# EAGLE board SwitchMount v1.0 (EAGLE 6.6.0)
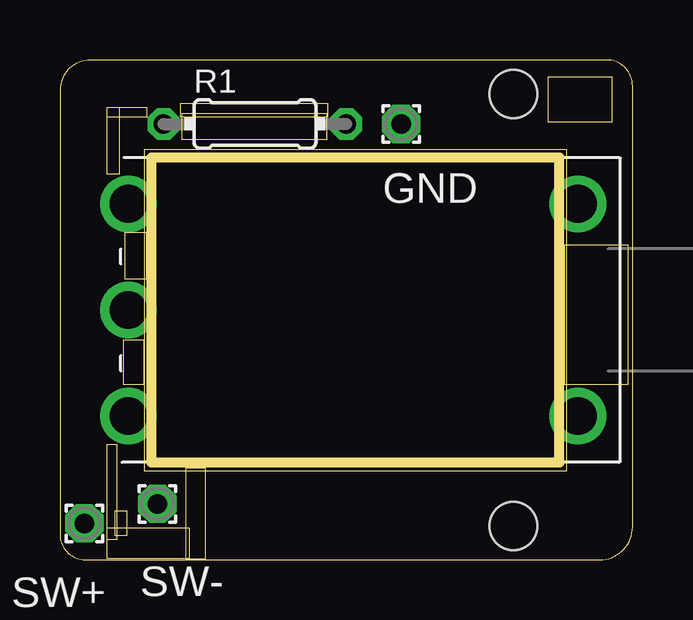
[diagram p0: board, top side]
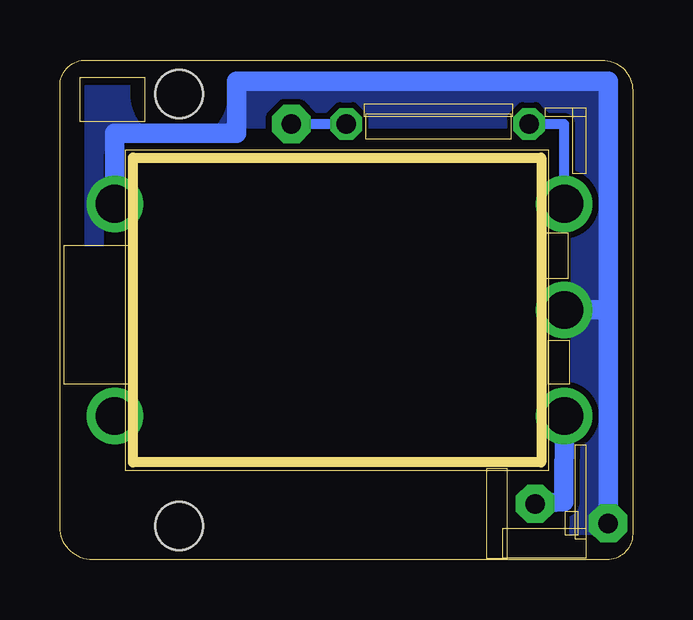
[diagram p1: board, bottom side, seen from below]

Size 23.88 x 20.83 mm. Coordinates in mm from the lower left corner, seen from the top.
Outline: 0,19.56 0,1.08 arc90 1.08,0 22.51,0 arc90 23.88,1.37 23.88,19.75 arc90 22.8,20.83 1.27,20.83 arc90 0,19.56
Outline: 3.81,16.76 3.81,4.06 20.83,4.06 20.83,16.76 3.81,16.76
Copper layers (1*16): Top 0.035mm / dielectric 1.5mm / Bottom 0.035mm
Design rules "default": minimum track width 10mil, minimum drill 24mil, track to track 8mil, track to pad 8mil, pad to pad 8mil, via to via 8mil, smd to smd 8mil, copper to edge 40mil, drill to drill 8mil, minimum pad ring 10mil, minimum via ring 8mil, stop-mask expansion 4mil, vias tented up to drill 0mil, thermal gap 10mil
Holes 2 mm at 18.91,19.41 18.91,1.41
Milling: area 3.5,3.7 to 21.1,17.1; area 2.7,11.7 to 3.6,13.6; area 2.6,7.3 to 3.5,9.1; area 2,0.9 to 2.4,4.8; area 2,16.1 to 2.5,18.8; area 2,18.5 to 3.6,18.8; area 5,18.5 to 11.2,19; area 5.1,17.5 to 11.1,18.6; area 20.3,18.3 to 23,20.1; area 21,7.3 to 23.7,13.1; area 5.2,0.1 to 6.1,3.8; area 2,0.1 to 5.4,1.3; 1 more areas

## Footprints (pad centres in the part's own frame; a part is rotated, then mirrored left to right if it is on the bottom)
1,6/0,8 = drill 0.813 pad 1.6 octagon: 1 0,0
0204/7 = drill 0.813 octagon: 1 -3.81,0; 2 3.81,0
SWITCH-PUSHON-PUSHOFF-LED = drill 1.575: 1 18.74,-4.42; 2 18.74,0; 3 18.74,4.42; 4 0,4.42; 5 0,-4.42

## Placement (x,y rotation side)
GND  [1,6/0,8]  14.22,18.16 0 top
R1  2k  [0204/7]  8.13,18.16 0 top
S1  [SWITCH-PUSHON-PUSHOFF-LED]  21.59,10.41 180 top
SW+  [1,6/0,8]  1.02,1.52 0 top
SW-  [1,6/0,8]  4.06,2.34 0 top

## Library data of the parts
GND SW+ SW- = wirepad
R1 = rcl
S1 = AHandimate

## Nets
N$1: S1.2 S1.5 SW+.1
N$2: R1.1 S1.1
N$3: S1.3 SW-.1
N$4: GND.1 R1.2

## Tracks (layer width: path | path; a pad name or v marks a point on that pad's centre or on a via)
N$1
  Bottom 0.813: SW+.1 1.02,10.41 | 1.02,10.41 S1.2 | S1.5 21.59,17.78 16.51,17.78 16.51,19.94 1.02,19.94 1.02,10.41
  pour Bottom (isolate 0.254, no thermals): 3.56,6.6 3.56,13.21 24.13,13.21 24.38,23.62 -1.78,23.62 -1.78,0 2.54,0 2.29,6.6
N$2
  Bottom 0.406: S1.1 2.85,18.16 R1.1
N$3
  Bottom 0.813: SW-.1 2.88,2.41 S1.3
N$4
  Bottom 0.406: R1.2 GND.1